# Altium PCB RatumnScanner_PcbDoc@20260329fix1.pcbdoc (part 2 of 2)
Units mil, origin at the board's own origin, x right, y up, seen from the top; angles counter-clockwise.
Board outline 3937.01 x 983.86 mil, 6 copper layers (Top Layer, 内层1, 内层2, CONNECTION, IO_PINS, Bottom Layer), stack 62.125 mil thick; 143 components, 128 nets, 581 pads, 301 vias.
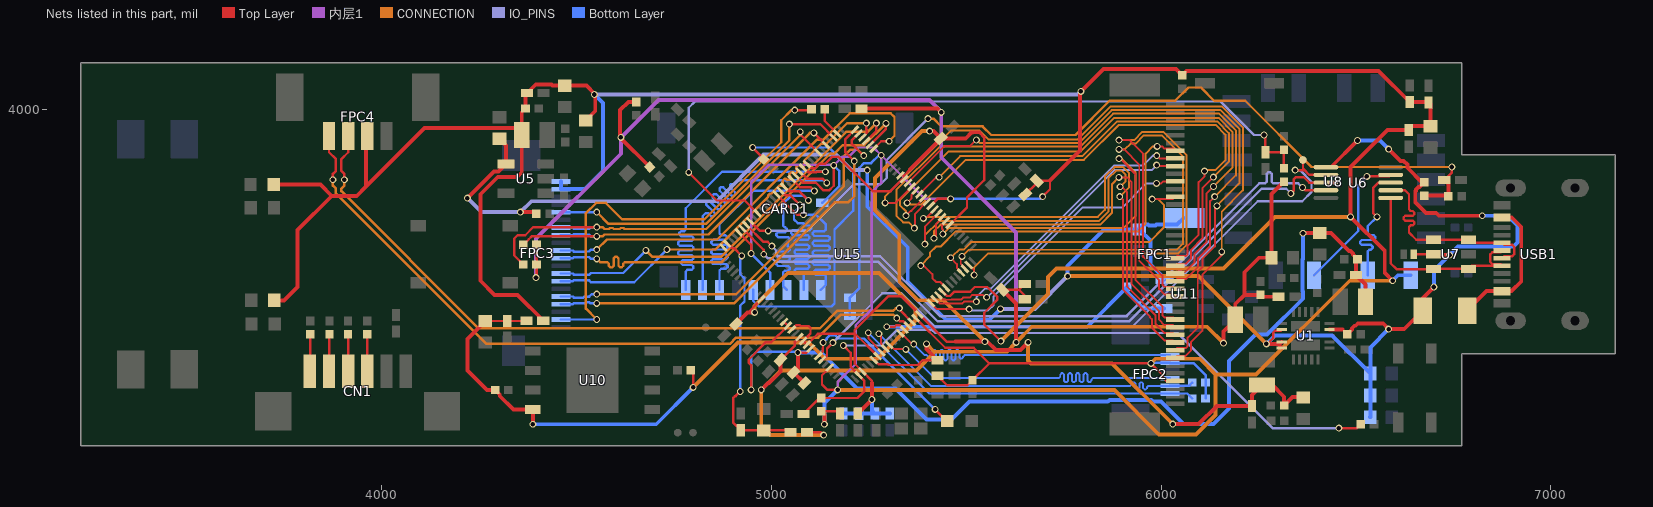
[diagram p6: the nets of this part, all layers, seen from the top]

## Via types
v1: diameter 17.72, hole 11.81, Top Layer to Bottom Layer, 301 vias

## Nets (pads, with @x,y where several pads share a name; then routed paths per layer and width w, separated by ;. In a path a pad name is that pad's centre, name@x,y a point inside that pad or via, vN(x,y) a via of type N, cw(c..) or ccw(c..) an arc to the next point about the centre after c; other vN are vias at no path point) (continued)
LCD_D5: FPC1.13 U15.93 | length 784.4
  Top Layer w5: v1(5459.96,3619) 5476.21,3602.76 5476.21,3593.79 5486.93,3583.06 U15.93@5486.93,3581.03 ; v1(5977.12,3769.61) 6008,3769.61 6008.66,3770.26 6030.48,3770.26 FPC1.13@6035.79,3775.57
  CONNECTION w5: v1(5459.96,3619) 5464.94,3623.99 5465.85,3623.99 5482.01,3640.14 5493.79,3640.14 5512.72,3659.08 5969.08,3659.08 6008,3698 6008,3754 5992.39,3769.61 v1(5977.12,3769.61)
LCD_D6: FPC1.26 U15.94 | length 1500.6
  Top Layer w5: v1(5489.2,3622.8) 5485.95,3619.55 5485.95,3603.53 5496.67,3592.81 U15.94@5496.67,3590.78 ; v1(5892,3897.04) 5904.96,3897.04 5944,3858 5944,3611.47 5994.67,3560.8 5994.67,3538.97 6008.66,3524.98 6030.48,3524.98 FPC1.26@6035.79,3519.67
  CONNECTION w5: v1(5489.2,3622.8) 5505.97,3639.58 6040.58,3639.58 6055.94,3654.94 6055.94,3879.31 6002.27,3932.98 5955.73,3932.98 5934.48,3911.73 5921.73,3911.73 5907.04,3897.04 v1(5892,3897.04)
LCD_D7: FPC1.25 U15.95 | length 1527
  Top Layer w5: U15.95@5506.42,3600.52 5520.16,3586.78 v1(5520.16,3574.82) ; v1(5892,3920.74) 5919.26,3920.74 5954,3886 5954,3621.17 6003.69,3571.48 6003.69,3549.65 6008.66,3544.68 6030.48,3544.68 FPC1.25@6035.79,3539.37
  CONNECTION w5: v1(5520.16,3574.82) 5520.16,3594.41 5556.31,3630.56 6044.31,3630.56 6064.95,3651.2 6064.95,3883.05 6006,3942 5952,3942 5930.74,3920.74 v1(5892,3920.74)
LCD_D8: FPC1.24 U15.109 | length 1640.6
  Top Layer w5: v1(5367,3695) 5368,3696 5368,3731.16 U15.109@5399.24,3762.4 ; FPC1.24@6035.79,3559.07 6041.1,3564.38 6062.93,3564.38 6094.95,3596.4 6094.95,3618.23 6126,3649.28 6126,3764.66 v1(6137.34,3776)
  CONNECTION w5: v1(5367,3695) 5352.25,3709.75 5338.25,3709.75 5320.98,3727.02 5320.98,3792.98 5432,3904 5792,3904 5877.02,3989.02 6149.23,3989.02 6192.06,3946.19 6192.06,3830.72 v1(6137.34,3776)
LCD_D9: FPC1.23 U15.110 | length 1502.5
  Top Layer w5: v1(5345.43,3727.09) 5357.94,3739.6 5358.98,3739.6 5389.5,3770.11 U15.110@5389.5,3772.14 ; FPC1.23@6035.79,3578.77 6041.05,3584.03 6062.93,3584.03 6085.93,3607.04 6085.93,3628.91 6116,3658.98 6116,3783.47 v1(6134.41,3801.89)
  CONNECTION w5: v1(5345.43,3727.09) 5345.43,3738.45 5330,3753.89 5330,3766.32 5455.68,3892 5794,3892 5880.03,3978.03 6147.47,3978.03 6183.05,3942.45 6183.05,3850.52 v1(6134.41,3801.89)
LCD_D10: FPC1.22 U15.111 | length 1294.7
  Top Layer w5: U15.111@5379.75,3781.89 5423.61,3825.74 v1(5430.26,3825.74) ; FPC1.22@6035.79,3598.42 6041.05,3603.68 6062.93,3603.68 6076.92,3617.67 6076.92,3639.55 6106,3668.63 6106,3798 v1(6134,3826)
  CONNECTION w5: v1(5430.26,3825.74) 5484.53,3880 5798,3880 5887.02,3969.02 6143.73,3969.02 6174.03,3938.72 6174.03,3866.03 v1(6134,3826)
LCD_D11: FPC1.21 U15.112 | length 1351.8
  Top Layer w5: v1(5348.31,3760.1) 5359.29,3771.08 5359.29,3778.87 5370.01,3789.6 U15.112@5370.01,3791.63 ; FPC1.21@6035.79,3618.07 6041.1,3623.38 6062.93,3623.38 6067.9,3628.35 6067.9,3650.18 6096,3678.28 6096,3813.08 6111.43,3828.51 v1(6111.43,3841.47)
  CONNECTION w5: v1(5348.31,3760.1) 5351.9,3760.1 5356,3756 5385.05,3756 5499.05,3870 5802,3870 5892,3960 6140,3960 6165.02,3934.98 6165.02,3869.77 6139.25,3844 6113.96,3844 v1(6111.43,3841.47)
LCD_D12: FPC1.34 U15.113 | length 1834.1
  Top Layer w5: v1(5292,3760) 5318.89,3760 U15.113@5360.27,3801.37 ; FPC1.34@6035.79,3362.17 6041.1,3367.48 6062.93,3367.48 6076.92,3381.47 6076.92,3403.3 6106,3432.38 6106,3576 6155.58,3625.58 v1(6155.58,3634)
  CONNECTION w5: v1(5292,3760) 5292,3776.75 5461.25,3946 5534,3946 5557.97,3922.03 5784.53,3922.03 5869.55,4007.05 6156.7,4007.05 6210.09,3953.66 6210.09,3792.09 6155.58,3737.58 v1(6155.58,3634)
LCD_D13: FPC1.33 U15.114 | length 1604.1
  Top Layer w5: U15.114@5350.52,3811.12 5445.41,3906 5510.66,3906 v1(5526,3921.34) ; FPC1.33@6035.79,3381.87 6041.1,3387.18 6062.93,3387.18 6067.9,3392.15 6067.9,3413.98 6094,3440.08 6094,3582.7 6106,3594.7 6106,3616.53 6138,3648.53 6138,3746.96 v1(6143.34,3752.3)
  CONNECTION w5: v1(5526,3921.34) 5534.33,3913.02 5788.27,3913.02 5873.28,3998.03 6152.97,3998.03 6201.08,3949.92 6201.08,3810.04 v1(6143.34,3752.3)
LCD_D14: FPC1.32 U15.107 | length 1193
  Top Layer w5: v1(5390,3720) 5395.82,3720 U15.107@5418.73,3742.91 ; v1(5894,3776) 5902,3768 5902,3538 5972,3468 5972,3465.37 5976.64,3460.73 5976.64,3438.9 6008.66,3406.88 6030.48,3406.88 FPC1.32@6035.79,3401.57
  CONNECTION w5: v1(5390,3720) 5394,3724 5838,3724 5855.97,3741.97 5855.97,3826.91 5880.72,3851.67 5902.56,3851.67 5918,3836.23 5918,3800 v1(5894,3776)
LCD_D15: FPC1.31 U15.106 | length 1244.9
  Top Layer w5: v1(5394,3654) 5394,3698.69 U15.106@5428.47,3733.17 ; v1(5894.72,3801.25) 5898.75,3801.25 5912,3788 5912,3546 5952,3506 5952,3505.07 5985.66,3471.41 5985.66,3449.59 6008.66,3426.58 6030.48,3426.58 FPC1.31@6035.79,3421.27
  CONNECTION w5: v1(5394,3654) 5394,3676.75 5430.42,3713.17 5840.42,3713.17 5864.98,3737.73 5864.98,3823.18 5884.46,3842.65 5898.83,3842.65 5908.98,3832.49 5908.98,3815.51 v1(5894.72,3801.25)
LCD_D16: FPC1.30 U15.105 | length 1124.8
  Top Layer w5: v1(5417.24,3669.24) 5422.66,3674.66 5422.66,3705.83 5438.22,3721.39 U15.105@5438.22,3723.42 ; v1(5891.64,3825.31) 5912.69,3825.31 5924,3814 5924,3552.77 5994.67,3482.1 5994.67,3460.27 6008.66,3446.28 6030.48,3446.28 FPC1.30@6035.79,3440.97
  CONNECTION w5: v1(5417.24,3669.24) 5417.24,3687.24 5434.16,3704.16 5844.16,3704.16 5874,3734 5874,3807.67 v1(5891.64,3825.31)
LCD_D17: FPC1.29 U15.104 | length 1208
  Top Layer w5: v1(5440,3680) 5440,3691.13 5437.24,3693.89 5437.24,3702.95 U15.104@5447.96,3713.68 ; v1(5892,3873.34) 5894.66,3873.34 5934,3834 5934,3562.47 6003.69,3492.78 6003.69,3470.85 6008.66,3465.88 6030.58,3465.88 FPC1.29@6035.79,3460.67
  CONNECTION w5: v1(5440,3680) 5455.14,3695.14 5903.14,3695.14 5934,3726 5934,3838.75 5899.41,3873.34 v1(5892,3873.34)
LCD_DCLK: FPC1.11 U15.85 | length 785
  Top Layer w5: U15.85@5408.99,3503.09 5424.76,3487.31 v1(5507.57,3487.31) ; v1(5988.17,3809.97) 5999.97,3809.97 6004.97,3814.97 FPC1.11@6035.79,3814.97
  IO_PINS w5: v1(5507.57,3487.31) 5510.88,3484 5556.46,3484 5570,3497.54 5570,3520 5798,3748 5900,3748 5961.97,3809.97 v1(5988.17,3809.97)
LCD_DEN: FPC1.7 U15.89 | length 989.2
  Top Layer w5: v1(5383.25,3598.75) 5391.27,3598.75 5412.89,3577.14 5412.89,3567.05 5423.05,3556.89 5433.14,3556.89 U15.89@5447.96,3542.06 ; v1(5990,3904.77) 6002.87,3904.77 6008.66,3898.98 6030.48,3898.98 FPC1.7@6035.79,3893.67
  CONNECTION w5: v1(5383.25,3598.75) 5406.9,3622.41 5406.9,3631.65 5423.25,3648 5434,3648 5472.13,3686.13 5940.13,3686.13 5960.24,3706.24 5960.24,3761.96 5959.78,3762.42 5959.78,3776.79 5960.24,3777.26 5960.24,3886.24 5978.77,3904.77 v1(5990,3904.77)
LCD_HSYNC: FPC1.9 U15.87 | length 761.2
  Top Layer w5: U15.87@5428.47,3522.58 5430.51,3522.58 5441.23,3511.85 5446.27,3511.85 5446.74,3511.38 5462.24,3511.38 5462.86,3512 5487.25,3512 5492.27,3517.02 5508.61,3517.02 5515.6,3524 5542,3524 5548.13,3517.87 v1(5552.39,3517.87) ; v1(5988.39,3856.93) 5990.94,3854.37 FPC1.9@6035.79,3854.37
  IO_PINS w5: v1(5552.39,3517.87) 5553.87,3517.87 5880,3844 5975.46,3844 v1(5988.39,3856.93)
LCD_VSYNC: FPC1.8 U15.86 | length 788.1
  Top Layer w5: U15.86@5418.73,3512.83 5420.76,3512.83 5431.49,3502.11 5443.89,3502.11 5444,3502 5490,3502 5494.66,3506.66 v1(5526,3506.66) ; v1(5988.77,3881.07) 5995.87,3873.97 FPC1.8@6035.79,3873.97
  IO_PINS w5: v1(5526,3506.66) 5526,3518 5548,3540 5563.25,3540 5876.27,3853.02 5876.94,3853.02 5879.93,3856 5954,3856 5979.07,3881.07 v1(5988.77,3881.07)
MIPI/LVDS_CLK_N: FPC3.8 U15.125 | length 1042.7
  Top Layer w6.18: U15.125@5243.35,3918.29 5269.32,3944.27 v1(5269.32,3964.68)
  CONNECTION w6.18: v1(4678,3638) 4694,3622 4872.04,3622 5192.04,3942 5246.64,3942 v1(5269.32,3964.68)
  Bottom Layer w6.18: FPC3.8@4459.79,3578.66 4490.58,3578.66 4493.34,3575.91 4525.35,3575.91 4526.02,3575.24 4532.2,3575.24 4536.96,3580 4620,3580 v1(4678,3638)
MIPI/LVDS_CLK_P: FPC3.7 U15.126 | length 1041.4
  Top Layer w6.18: U15.126@5233.6,3928.04 5244.92,3939.35 5244.92,3948.07 5243.64,3949.35 v1(5243.64,3964.36)
  CONNECTION w6.18: v1(4732,3640.31) 4856.31,3640.31 4991.29,3775.29 4991.29,3779.18 4996.15,3784.03 5000.03,3784.03 5020.15,3804.15 5026.06,3804.15 5028.89,3806.98 5028.89,3816.78 5033.74,3821.63 5037.63,3821.63 5040.26,3819 5046.44,3819 5049,3821.56 5049,3827.74 5046.37,3830.37 5046.37,3834.26 5051.22,3839.11 5055.11,3839.11 5057.74,3836.48 5063.92,3836.48 5066.48,3839.04 5066.48,3845.22 5063.85,3847.85 5063.85,3851.74 5068.71,3856.6 5072.6,3856.6 5075.22,3853.97 5081.41,3853.97 5083.97,3856.53 5083.97,3867.97 5128,3912 5142,3912 5194.36,3964.36 v1(5243.64,3964.36)
  Bottom Layer w6.18: FPC3.7@4459.79,3558.97 4490.58,3558.97 4493.34,3561.73 4519.48,3561.73 4520.14,3561.06 4532.2,3561.06 4536.96,3556.3 4647.99,3556.3 v1(4732,3640.31)
MIPI/LVDS_D0_N: FPC3.5 U15.127 | length 1064
  Top Layer w6.18: U15.127@5223.86,3937.78 5206,3919.92 5206,3912 v1(5237,3881)
  CONNECTION w6.18: v1(4552,3525.64) 4909.13,3525.64 5186,3802.51 5186,3880 5202,3896 5222,3896 v1(5237,3881)
  Bottom Layer w6.18: FPC3.5@4459.79,3519.6 4490.58,3519.6 4493.33,3516.85 4517.76,3516.85 4520.14,3519.24 4532.2,3519.24 4538.6,3525.64 v1(4552,3525.64)
MIPI/LVDS_D0_P: FPC3.4 U15.128 | length 1060.3
  Top Layer w6.18: v1(5212.59,3867.21) 5190,3889.8 5190,3923.41 U15.128@5214.11,3947.53
  CONNECTION w6.18: v1(4552,3501.94) 4903.94,3501.94 5163.01,3761.01 5197.01,3761.01 5212.59,3776.59 v1(5212.59,3867.21)
  Bottom Layer w6.18: FPC3.4@4459.79,3499.92 4490.58,3499.92 4493.33,3502.68 4523.63,3502.68 4526.02,3505.06 4532.2,3505.06 4535.32,3501.94 v1(4552,3501.94)
MIPI/LVDS_D1_N: FPC3.11 U15.123 | length 1123.5
  Top Layer w6.18: U15.123@5262.83,3898.81 5282.03,3918 v1(5302,3918)
  CONNECTION w6.18: v1(4552,3640) 4578,3666 4861.13,3666 5117.33,3922.2 5133.56,3922.2 5201.36,3990 5306,3990 5316,3980 5316,3932 v1(5302,3918)
  Bottom Layer w6.18: FPC3.11@4459.79,3637.71 4490.58,3637.71 4493.33,3634.96 4519.87,3634.96 4520.14,3635.24 4532.2,3635.24 4536.96,3640 v1(4552,3640)
MIPI/LVDS_D1_P: FPC3.10 U15.124 | length 1123.5
  Top Layer w6.18: U15.124@5253.09,3908.55 5294,3949.46 v1(5294,3964)
  CONNECTION w6.18: v1(4552,3616.3) 4560.3,3608 4578.6,3608 4582.98,3603.63 4582.98,3598.37 4587.35,3594 4590.97,3594 4595.34,3598.37 4595.34,3617.63 4599.71,3622 4603.33,3622 4607.7,3617.63 4607.7,3598.76 4612.07,3594.39 4615.69,3594.39 4620.06,3598.76 4620.06,3603.63 4624.43,3608 4872.46,3608 5150.91,3886.45 5161.71,3886.45 5183.26,3908 5238,3908 v1(5294,3964)
  Bottom Layer w6.18: FPC3.10@4459.79,3618.03 4490.58,3618.03 4493.33,3620.79 4525.74,3620.79 4526.02,3621.06 4532.2,3621.06 4536.96,3616.3 v1(4552,3616.3)
MIPI/LVDS_MCLK0: FPC3.2 R9.2 | length 1134.1
  Top Layer w6.18: v1(5060,3998) 5100.96,3998 R9.2@5102.96,4000
  CONNECTION w6.18: v1(4552,3460.55) 4524,3488.55 4524,3733.51 4550.49,3760 4575,3760 4617,3718 4828,3718 5025.32,3915.32 5025.32,3972.06 5051.26,3998 v1(5060,3998)
  Bottom Layer w6.18: FPC3.2@4459.79,3460.55 v1(4552,3460.55)
MIPI/LVDS_RST: FPC3.16 U15.3 | length 856.7
  Top Layer w6.18: v1(5046,3962) 5125.45,3962 U15.3@5159.41,3928.04
  CONNECTION w6.18: v1(4552,3736.14) 4582.14,3706 4831.81,3706 5046,3920.19 v1(5046,3962)
  Bottom Layer w6.18: FPC3.16@4459.79,3736.14 v1(4552,3736.14)
MIPI_CLK: R9.1 U15.2 | length 75.5
  Top Layer w6.18: R9.1@5137.04,4000 5137.04,3969.9 U15.2@5169.16,3937.78
MIPI_I2C_SCL: FPC3.13 R48.1 U15.5 | length 1004.3
  Top Layer w6.18: v1(5109.12,3939.35) U15.5@5139.92,3908.55
  Top Layer w6.2: R48.1@4363.48,3652.17 4377.34,3666.03 4377.34,3666.56 4382.66,3671.88 4383.19,3671.88 4385.31,3674 v1(4552,3674)
  CONNECTION w6.18: v1(4552,3674) 4567.04,3674 4571.9,3678.86 4838.42,3678.86 5098.91,3939.35 v1(5109.12,3939.35)
  Bottom Layer w6.18: FPC3.13@4459.79,3677.08 4490.58,3677.08 4493.44,3679.94 4519.05,3679.94 4520.13,3678.86 4532.1,3678.86 4536.96,3674 v1(4552,3674)
MIPI_I2C_SDA: FPC3.14 R47.1 U15.7 | length 1104.4
  Top Layer w6.18: v1(5074,3942) 5074,3935.51 U15.7@5120.44,3889.07
  Top Layer w6.2: R47.1@4363.48,3601.97 4340,3625.45 4340,3668 4348.86,3676.86 4368.29,3676.86 4389.14,3697.7 v1(4552,3697.7)
  CONNECTION w6.18: v1(4552,3697.7) 4567.04,3697.7 4571.9,3692.84 4583.35,3692.84 4585.93,3695.42 4593.12,3695.42 4595.71,3692.84 4610.77,3692.84 4613.35,3695.42 4620.54,3695.42 4623.13,3692.84 4833.07,3692.84 5074,3933.77 v1(5074,3942)
  Bottom Layer w6.18: FPC3.14@4459.79,3696.77 4490.58,3696.77 4493.44,3693.92 4524.84,3693.92 4525.92,3692.84 4532.1,3692.84 4536.96,3697.7 v1(4552,3697.7)
NPOR: C6.2 R4.1 R23.1 U15.66 | length 1772.1
  Top Layer w6.2: C6.2@5082.41,3218.4 5123.35,3259.35 R4.1@5127.91,3259.35 5221.35,3259.35 5238,3276 5238,3303.82 U15.66@5223.86,3317.96 5223.86,3319.14 5203.78,3339.22 5203.78,3374.91 v1(5184.75,3393.94) ; v1(6456,3182) 6502.45,3182 R23.1@6512.33,3191.88
  IO_PINS w6.2: v1(5184.75,3393.94) 5281.94,3393.94 5322,3434 5412.45,3434 5420.45,3426 6042,3426 6286,3182 v1(6456,3182)
PWM_LCD: R46.2 U11.4 U15.78 | length 837.4
  Top Layer w6.2: v1(5296,3442) 5316.54,3442 5320.74,3446.2 5329.45,3446.2 U15.78@5340.78,3434.88
  Bottom Layer w10: v1(5296,3442) 5811.04,3442 R46.2@5914,3544.96 5914,3530 5955.29,3488.71 U11.4@6007.49,3488.71
RD+: CN1.2 R43.2 | length 95.7
  Top Layer w6.2: CN1.2@3864.76,3327.67 3866,3328.91 R43.2@3866,3422.83
RD-: CN1.1 R42.2 | length 95.6
  Top Layer w6.2: CN1.1@3815.55,3327.67 3816.49,3328.61 R42.2@3816.49,3422.83
RECOVERY: C8.2 R24.1 R25.1 U15.23 | length 2048.6
  Top Layer w6.18: C8.2@6267.74,3889.66 6308.15,3889.66 R24.1@6315.11,3896.63 R25.1@6315.11,3848.38
  Top Layer w6.2: v1(4788,3838) 4860,3766 4931.71,3766 U15.23@4964.54,3733.17 ; v1(6264,3934) 6267.74,3930.26 C8.2@6267.74,3889.66
  IO_PINS w6.2: v1(4788,3838) 4788,4004 4804,4020 6152,4020 6238,3934 v1(6264,3934)
SDMMC0_CLK: CARD1.5 R10.2 | length 929
  Top Layer w6.18: v1(4952,3902) 4979.95,3874.05 R10.2@4979.95,3872.05
  Bottom Layer w6.18: v1(4952,3902) 5148,3902 5210,3840 5210,3740 5162,3692 5162,3502 5154,3494 4968,3494 4953.53,3508.47 CARD1.5@4953.53,3536.57
SDMMC0_CMD: CARD1.3 U15.16 | length 570.6
  Top Layer w6.18: U15.16@5032.75,3801.37 5033.95,3801.37 5045.26,3790.06 5071.3,3790.06 v1(5094.98,3766.38)
  Bottom Layer w6.18: CARD1.3@5040.14,3536.57 5030,3546.71 5030,3581.3 5034.37,3585.67 5042.85,3585.67 5047.22,3590.04 5047.22,3593.66 5042.85,3598.03 5017.15,3598.03 5012.78,3602.4 5012.78,3606.02 5017.15,3610.4 5042.85,3610.4 5047.22,3614.77 5047.22,3618.39 5042.85,3622.76 5017.15,3622.76 5012.78,3627.13 5012.78,3630.75 5017.15,3635.12 5042.85,3635.12 5047.22,3639.49 5047.22,3643.11 5041.87,3648.46 5041.87,3658.87 5047.22,3664.22 5047.22,3667.84 5042.85,3672.21 5017.15,3672.21 5012.78,3676.58 5012.78,3680.2 5017.15,3684.57 5035.63,3684.57 5040,3688.94 5040,3692.56 5035.63,3696.93 5034.37,3696.93 5030,3701.3 5030,3758 5050,3778 5083.36,3778 v1(5094.98,3766.38)
SDMMC0_D0: CARD1.7 U15.14 | length 764.4
  Top Layer w6.18: U15.14@5052.24,3820.86 5072.84,3800.25 5100.38,3800.25 v1(5110.29,3790.35)
  Bottom Layer w6.18: CARD1.7@4866.91,3536.57 4866.91,3586.44 4871.28,3590.81 4883.22,3590.81 4887.59,3595.18 4887.59,3598.8 4883.22,3603.17 4850.6,3603.17 4846.23,3607.54 4846.23,3611.16 4850.6,3615.53 4883.22,3615.53 4887.59,3619.9 4887.59,3623.53 4883.22,3627.9 4850.6,3627.9 4846.23,3632.27 4846.23,3635.89 4850.6,3640.26 4883.22,3640.26 4887.59,3644.63 4887.59,3648.25 4883.22,3652.62 4850.6,3652.62 4846.23,3656.99 4846.23,3660.61 4850.6,3664.98 4881.81,3664.98 4886.18,3669.35 4886.18,3672.97 4881.81,3677.35 4871.28,3677.35 4866.91,3681.72 4866.91,3704.91 4952.57,3790.57 5085.07,3790.57 5085.97,3791.47 5109.17,3791.47 v1(5110.29,3790.35)
SDMMC0_D1: CARD1.8 U15.12 | length 874.4
  Top Layer w6.18: U15.12@5071.72,3840.35 5072.92,3840.35 5091.07,3822.2 5131.28,3822.2 v1(5142.07,3811.41)
  Bottom Layer w6.2: CARD1.8@4823.6,3536.57 4823.6,3725.61 4831.36,3733.36 4837.56,3733.36 4845.26,3725.65 4851.46,3725.65 4854.03,3728.22 4854.03,3734.42 4832.42,3756.03 4832.42,3762.23 4834.99,3764.8 4841.19,3764.8 4862.8,3743.19 4869,3743.19 4871.57,3745.75 4871.57,3751.95 4849.95,3773.57 4849.95,3779.77 4852.52,3782.34 4858.72,3782.34 4880.34,3760.72 4886.54,3760.72 4889.1,3763.29 4889.1,3769.49 4867.49,3791.1 4867.49,3797.3 4870.06,3799.87 4876.26,3799.87 4897.87,3778.26 4904.07,3778.26 4906.64,3780.83 4906.64,3787.03 4894.27,3799.4 4894.27,3805.6 4896.84,3808.17 4906.17,3808.17 4916,3818 5135.48,3818 v1(5142.07,3811.41)
SDMMC0_D2: CARD1.1 U15.18 | length 694.6
  Top Layer w6.18: U15.18@5013.26,3781.89 5065.65,3729.49 v1(5082.27,3729.49)
  Bottom Layer w6.2: v1(5082.27,3729.49) 5114.51,3729.49 5140,3704 5140,3691.8 5135.62,3687.42 5110.38,3687.42 5106,3683.03 5106,3679.4 5110.38,3675.02 5145.59,3675.02 5149.98,3670.63 5149.98,3667 5145.59,3662.62 5110.38,3662.62 5106,3658.23 5106,3654.6 5110.38,3650.22 5145.59,3650.22 5149.98,3645.83 5149.98,3642.2 5145.59,3637.82 5110.38,3637.82 5106,3633.43 5106,3629.8 5110.38,3625.42 5145.59,3625.42 5149.98,3621.03 5149.98,3617.4 5145.59,3613.02 5110.38,3613.02 5106,3608.63 5106,3605 5110.38,3600.62 5145.59,3600.62 5149.98,3596.23 5149.98,3592.6 5145.59,3588.22 5113.27,3588.22 5108.89,3583.83 5108.89,3580.2 5113.27,3575.82 5135.62,3575.82 5140,3571.43 5140,3549.81 CARD1.1@5126.75,3536.57
SDMMC0_D3: CARD1.2 U15.17 | length 658.2
  Top Layer w6.18: U15.17@5023,3791.63 5024.2,3791.63 5035.97,3779.86 5047.98,3779.86 v1(5073.29,3754.56)
  Bottom Layer w6.18: v1(5073.29,3754.56) 5073.29,3750.93 5058,3735.65 5058,3717.63 5067.52,3708.12 5081.64,3708.12 5087.82,3701.93 5098.11,3701.93 5102.48,3697.56 5102.48,3693.94 5098.11,3689.57 5055.36,3689.57 5050.99,3685.2 5050.99,3681.58 5055.36,3677.21 5092.7,3677.21 5097.07,3672.84 5097.07,3669.22 5092.7,3664.85 5063.6,3664.85 5059.23,3660.48 5059.23,3656.86 5063.6,3652.49 5092.7,3652.49 5097.07,3648.11 5097.07,3644.49 5092.7,3640.12 5063.6,3640.12 5059.23,3635.75 5059.23,3632.13 5063.6,3627.76 5092.7,3627.76 5097.07,3623.39 5097.07,3619.77 5092.7,3615.4 5063.6,3615.4 5059.23,3611.03 5059.23,3607.41 5063.6,3603.04 5092.7,3603.04 5097.07,3598.67 5097.07,3595.05 5092.7,3590.67 5063.6,3590.67 5059.23,3586.3 5059.23,3582.68 5063.6,3578.31 5079.08,3578.31 5083.45,3573.94 CARD1.2@5083.45,3536.57
SDMMC0_DET: CARD1.9 U15.11 | length 915.2
  Top Layer w6.18: U15.11@5081.47,3850.09 5091.82,3839.74 5093.02,3839.74 5093.98,3838.78 5099.02,3838.78 5099.49,3838.31 5115.47,3838.31 5116.91,3839.74 v1(5138.68,3839.74)
  Bottom Layer w6.18: CARD1.9@4780.3,3536.57 4780.3,3583.87 4784.67,3588.24 4795.52,3588.24 4799.89,3592.61 4799.89,3596.23 4795.52,3600.61 4772.78,3600.61 4768.41,3604.98 4768.41,3608.6 4772.78,3612.97 4795.52,3612.97 4799.89,3617.34 4799.89,3620.96 4795.52,3625.33 4765.07,3625.33 4760.7,3629.7 4760.7,3633.32 4765.07,3637.69 4795.52,3637.69 4799.89,3642.06 4799.89,3645.68 4795.52,3650.05 4765.07,3650.05 4760.7,3654.43 4760.7,3658.05 4765.07,3662.42 4795.52,3662.42 4799.89,3666.79 4799.89,3670.41 4795.52,3674.78 4768.24,3674.78 4763.87,3679.15 4763.87,3682.77 4768.24,3687.14 4775.93,3687.14 4780.3,3691.51 4780.3,3746.3 4873.74,3839.74 v1(5138.68,3839.74)
SOC_USB_DN: U6.4 U15.26 | length 1787.3
  Top Layer w6.18: U15.26@4935.31,3703.93 4935.46,3703.93 4979.69,3659.69 4990.69,3659.69 v1(5001.33,3649.06) ; v1(6362.75,3799.25) 6369.69,3792.31 U6.4@6422.93,3792.31
  IO_PINS w6.18: v1(5001.33,3649.06) 5011.96,3638.43 5011.96,3627.43 5016.33,3623.06 5278.94,3623.06 5432.62,3469.38 5911.38,3469.38 6252,3810 6266.79,3810 6271.16,3814.37 6271.16,3834.58 6275.53,3838.95 6279.16,3838.95 6283.53,3834.58 6283.53,3814.37 6287.9,3810 6352,3810 v1(6362.75,3799.25)
SOC_USB_DP: U6.3 U15.27 | length 1788.8
  Top Layer w6.18: U15.27@4925.57,3694.2 4925.57,3694.05 4980.45,3639.18 v1(4980.45,3628.18) ; v1(6333.06,3784) 6340,3790.94 6340,3820 6346,3826 6366,3826 6380,3812 U6.3@6422.93,3812
  IO_PINS w6.18: v1(4980.45,3628.18) 4991.08,3617.55 5002.08,3617.55 5010.54,3609.08 5273.6,3609.08 5426.96,3455.72 5917.49,3455.72 6257.79,3796.02 6321.03,3796.02 v1(6333.06,3784)
TD+: CN1.4 R56.2 | length 95.1
  Top Layer w6.2: CN1.4@3963.19,3327.67 R56.2@3963.23,3422.83
TD-: CN1.3 R55.2 | length 95.4
  Top Layer w6.2: R55.2@3913.49,3422.83 3913.97,3422.35 CN1.3@3913.97,3327.67
TP_INT: FPC2.3 U15.74 | length 903.2
  Top Layer w5: U15.74@5301.8,3395.9 5303.84,3395.9 5314.56,3385.18 5343.98,3385.18 v1(5345.21,3383.94)
  Bottom Layer w5: v1(5345.21,3383.94) 5419,3310.16 5737.63,3310.16 5741.17,3313.7 5741.17,3319.42 5744.71,3322.95 5747.63,3322.95 5751.17,3319.42 5751.17,3303.4 5754.71,3299.87 5757.63,3299.87 5761.17,3303.4 5761.17,3319.42 5764.71,3322.95 5767.63,3322.95 5771.17,3319.42 5771.17,3303.4 5774.71,3299.87 5777.63,3299.87 5781.17,3303.4 5781.17,3319.42 5784.71,3322.95 5787.63,3322.95 5791.17,3319.42 5791.17,3303.4 5794.71,3299.87 5797.63,3299.87 5801.17,3303.4 5801.17,3319.42 5804.71,3322.95 5807.63,3322.95 5811.17,3319.42 5811.17,3303.7 5814.71,3300.16 5817.63,3300.16 5821.17,3303.7 5821.17,3306.62 5824.71,3310.16 FPC2.3@6022.69,3310.16
TP_RST: FPC2.6 U15.77 | length 902.4
  Top Layer w5: U15.77@5331.03,3425.14 5333.07,3425.14 5360.87,3397.34 v1(5365.34,3397.34)
  Bottom Layer w5: v1(5365.34,3397.34) 5393.46,3369.21 5398.62,3369.21 5402.15,3365.67 5402.15,3359.54 5405.69,3356 5408.62,3356 5412.15,3359.54 5412.15,3378.88 5415.69,3382.42 5418.62,3382.42 5422.15,3378.88 5422.15,3359.54 5425.69,3356 5428.62,3356 5432.15,3359.54 5432.15,3378.88 5435.69,3382.42 5438.62,3382.42 5442.15,3378.88 5442.15,3359.54 5445.69,3356 5448.62,3356 5452.15,3359.54 5452.15,3378.88 5455.69,3382.42 5458.62,3382.42 5462.15,3378.88 5462.15,3359.54 5465.69,3356 5468.62,3356 5472.15,3359.54 5472.15,3378.88 5475.69,3382.42 5478.62,3382.42 5482.15,3378.88 5482.15,3363.91 5485.69,3360.38 5488.62,3360.38 5492.15,3363.91 5492.15,3365.67 5495.69,3369.21 FPC2.6@6022.69,3369.21
TP_SCL: FPC2.1 R40.2 U15.72 | length 965.4
  Top Layer w5: v1(5248.69,3426.69) 5248.69,3412.08 5282.31,3378.45 U15.72@5282.31,3376.42
  Bottom Layer w5: v1(5248.69,3426.69) 5404.58,3270.79 FPC2.1@6022.69,3270.79
  Bottom Layer w6.2: FPC2.1@6022.69,3270.79 6067.08,3270.79 R40.2@6079.97,3257.9
TP_SDA: FPC2.2 R41.2 U15.73 | length 960.4
  Top Layer w5: v1(5275.86,3424.04) 5281.33,3418.57 5281.33,3398.92 5292.06,3388.19 U15.73@5292.06,3386.16
  Bottom Layer w5: v1(5275.86,3424.04) 5409.43,3290.47 5920.52,3290.47 5924.06,3294.01 5924.06,3296.14 5927.59,3299.68 5930.52,3299.68 5934.06,3296.14 5934.06,3284.81 5937.59,3281.27 5940.52,3281.27 5944.06,3284.81 5944.06,3296.14 5947.59,3299.68 5950.52,3299.68 5954.06,3296.14 5954.06,3284.81 5957.59,3281.27 5960.52,3281.27 5964.06,3284.81 5964.06,3286.93 5967.59,3290.47 FPC2.2@6022.69,3290.47
  Bottom Layer w6.2: FPC2.2@6022.69,3290.47 6071.6,3290.47 R41.2@6079.97,3298.84
TYPEC_DN: U6.6 U7.1 U7.6 USB1.5 USB1.7 | length 552.5
  Top Layer w6.18: U6.6@6589.07,3772.63 6589.07,3604.93 6604,3590 6698.04,3590 U7.6@6698.71,3590.67 U7.1@6788.87,3590.67 6796.55,3598.35 USB1.5@6875.16,3598.35 6870.46,3603.05 6849.75,3603.05 6844.44,3608.36 6844.44,3627.69 6849.75,3633.01 6870.45,3633.01 USB1.7@6875.16,3637.72
TYPEC_DP: U6.7 U7.3 U7.4 USB1.6 USB1.8 | length 552
  Top Layer w6.18: U6.7@6589.07,3792.31 6625.69,3792.31 6636,3782 6636,3743.5 6640.37,3739.13 6645.63,3739.13 6650,3734.76 6650,3731.14 6645.63,3726.77 6626.37,3726.77 6622,3722.4 6622,3718.78 6626.37,3714.41 6645.63,3714.41 6650,3710.04 6650,3706.42 6645.63,3702.05 6640.37,3702.05 6636,3697.68 6636,3684 6654.53,3665.47 U7.4@6698.71,3665.47 U7.3@6788.87,3665.47 6796.94,3657.4 USB1.8@6875.16,3657.4 6879.86,3652.7 6900.58,3652.7 6905.89,3647.38 6905.89,3628.05 6900.58,3622.74 6879.87,3622.74 USB1.6@6875.16,3618.03
UART2_RX: FPC4.3 U15.80 | length 1802.9
  Top Layer w6.2: v1(3904.34,3819.18) 3904.34,3834.23 3896.58,3842 3896.58,3872.37 3914.18,3889.97 FPC4.3@3914.18,3931.61 ; v1(5328.57,3489.66) 5328.57,3486.06 U15.80@5360.27,3454.37
  CONNECTION w6.2: v1(3904.34,3819.18) 3904.34,3804.12 3896.58,3796.35 3896.58,3790.15 4248.73,3438 5124,3438 5169.46,3483.46 5313.36,3483.46 5319.56,3489.66 v1(5328.57,3489.66)
UART2_TX: FPC4.4 U15.79 | length 1832
  Top Layer w6.2: FPC4.4@3864.97,3931.61 3864.97,3889.97 3882.58,3872.37 3882.58,3842 3874.81,3834.23 v1(3874.81,3819.18) ; v1(5321.75,3464.15) 5329.48,3456.42 5337.54,3456.42 5349.34,3444.62 U15.79@5350.52,3444.62
  CONNECTION w6.2: v1(3874.81,3819.18) 3874.81,3804.12 3882.58,3796.35 3882.58,3784.35 4268.93,3398 4893.49,3398 4909.61,3414.12 5119.91,3414.12 5179.03,3473.24 5312.66,3473.24 v1(5321.75,3464.15)
USB_CTRL: TP1.1 U6.2 U15.59 | length 1708.2
  Top Layer w6.18: U15.59@5130.18,3356.94 5131.38,3356.94 5142.69,3368.25 5142.69,3386.15 v1(5157.74,3401.2) ; v1(6344,3844) 6368,3844 ; TP1.1@6364,3870 6364,3848 6368,3844 ; U6.2@6422.93,3831.68 6380.32,3831.68 6368,3844
  IO_PINS w6.18: v1(5157.74,3401.2) 5284.54,3528 5334,3528 5420,3442 5926,3442 6248,3764 6362,3764 6386,3788 6386,3814 6356,3844 v1(6344,3844)
USB_DET_IN: C58.2 R27.1 R28.2 U15.25 | length 2260.5
  Top Layer w6.2: U15.25@4945.05,3713.68 4970.73,3688 v1(4992,3688) ; C58.2@6726.65,3818.82 6746,3838.17 v1(6746,3852)
  Top Layer w10: R27.1@6675.24,3778.42 6735.32,3778.42 R28.2@6737.09,3776.65 6737.09,3808.38 C58.2@6726.65,3818.82
  CONNECTION w6.2: v1(5402,3976) 5416,3976 5436,3956 5542,3956 5564,3934 5780,3934 5868,4022 6036,4022 6070,4056 6102,4056 6136,4022 6216,4022 6386,3852 v1(6746,3852)
  IO_PINS w6.2: v1(4992,3688) 5092,3688 5212,3808 5280,3808 5296,3824 5296,3870 v1(5402,3976)
VBUS: F1.1 USB1.2 USB1.11 | length 368.5
  Top Layer w10: F1.1@6785.28,3483.5 6835.17,3533.39 USB1.2@6875.16,3533.39 6899.39,3533.39 6924,3558 6924,3698 6899.63,3722.37 USB1.11@6875.16,3722.37
VCC1V8_CODEC: C16.2 C17.2 L2.2 U15.31 | length 654.7
  Top Layer w6.2: U15.31@4886.6,3655.22 4887.78,3655.22 4899.11,3643.9 4904.1,3643.9 v1(4924,3624) ; v1(4920.1,3275.9) 4908.2,3264 4906.38,3264 4902,3259.62 4902,3238.79 4901.9,3238.7 4901.9,3196.17 C17.2@4921.62,3176.46 5043.73,3176.46 L2.2@5048.8,3171.39
  Bottom Layer w6.2: v1(4920.1,3275.9) 4920.1,3496.2 4931.11,3507.21 4931.11,3565.92 4920.1,3576.94 4920.1,3620.1 v1(4924,3624)
VCC1V8_MICBIAS: U15.32
VCC_1V8: C14.2 C15.2 C37.1 C38.1 C42.2 C43.1 L1.2 L2.1 L4.2 L6.1 R6.2 R11.2 R15.2 R25.2 R47.2 R48.2 U15.53 U15.70 | length 5358.2
  Top Layer w6.2: v1(4396,3568) 4397.56,3569.56 R47.2@4397.56,3601.97 R48.2@4397.56,3652.17 ; C14.2@5023.17,3357.17 5060.4,3394.4 5060.4,3402.88 5071.72,3414.21 U15.53@5071.72,3415.39 ; L2.1@5091.72,3171.39 5126.61,3171.39 v1(5134,3164) ; U15.70@5262.83,3356.94 5264,3356.94 5275.34,3345.6 5298.4,3345.6 5300,3344 5376,3344 5388.01,3356.01 C15.2@5426.75,3356.01 ; L4.2@5593.17,3536.83 5635.1,3536.83 ; C38.1@5650.04,3512.82 5650.04,3521.88 5635.1,3536.83 ; C37.1@5650.04,3551.77 5635.1,3536.83
  Top Layer w10: R11.2@4653.27,4018.89 4632.89,4018.89 4612,3998 4612,3928 R6.2@4687.95,3852.05 ; v1(4974,3280) 4991.33,3297.33 4993.89,3297.33 5023.17,3326.61 C14.2@5023.17,3357.17 ; L1.2@5231.31,4001.71 5426.29,4001.71 v1(5436,3992) ; v1(5398,3398) 5398,3384.75 C15.2@5426.75,3356.01 ; L4.2@5593.17,3536.83 5628,3502 v1(5628,3401.84) ; v1(6160,3400) 6160,3429.56 L6.1@6190.28,3459.84 6190.28,3500.28 6214.02,3524.02 ; C42.2@6301.47,3519.06 6259.89,3519.06 R15.2@6254.93,3524.02 6214.02,3524.02 ; R25.2@6315.11,3814.3 6283.37,3782.56 C43.1@6283.37,3619.06 6251.06,3619.06 6214.02,3582.02 6214.02,3524.02
  内层1 w10: v1(4396,3568) 4396,3668 4614,3886 v1(4614,3928) 4710,4024 5406,4024 v1@5436,3994 ; v1(5436,3992) 5436,3876 5628,3684 v1(5628,3401.84)
  CONNECTION w10: v1(5134,3164) 4998,3164 4974,3188 v1(4974,3280) 5024,3330 5372,3330 5420,3378 ; v1(5398,3398) 5418,3378 5420,3378 ; v1(6160,3400) 6118,3442 5668.16,3442 v1(5628,3401.84) 5604.16,3378 5420,3378
VCC_3V3: C10.1 C13.1 C29.2 C33.2 C34.2 C35.2 C50.1 C52.2 C53.2 C56.2 C57.2 C75.2 C76.2 CARD1.4 FPC1.37 FPC2.5 FPC3.19 FPC3.20 FPC4.2 L3.1 L8.1 L9.1 R4.2 R20.2 R26.2 R32.2 R34.2 R39.2 R40.1 R41.1 U8.11 U15.13 U15.28 U15.61 U15.81 U15.88 U15.108 | length 13210.8
  Top Layer w6.18: U15.13@5061.98,3830.61 5080.59,3812 5114,3812 5134,3792 5148,3792 5160,3804 v1(5160,3856)
  Top Layer w6.2: U15.28@4915.83,3684.45 4948,3652.28 v1(4948,3630) ; R4.2@5127.91,3225.27 5170.19,3225.27 C35.2@5176,3219.46 ; U15.61@5149.67,3337.45 5130,3317.78 5130,3294 5144,3280 v1(5170,3280) ; U15.81@5370.01,3464.11 5446.12,3388 5518.96,3388 5558.96,3348 ; U15.108@5408.99,3752.65 5426.33,3770 v1(5460,3770) ; C34.2@5426.54,3316 5450.54,3292 5502.96,3292 R26.2@5516,3305.04 5558.96,3348 ; U15.88@5438.22,3532.32 5439.4,3532.32 5450.73,3520.99 5458.25,3520.99 5469.58,3532.32 5510.32,3532.32 5522,3544 5554,3544 5580,3518 5580,3511.8 5546.1,3477.9 5546.1,3447.9 v1(5589,3405) ; L3.1@5651.17,3781.17 5681.17,3811.17 C29.2@5681.17,3816.83 5714.83,3816.83 5714.83,3794.83 v1(5696,3776) ; FPC1.37@6035.79,3303.17 6013.12,3303.17 6003.09,3313.21 6003.09,3318.91 v1(5974,3348) 5558.96,3348
  Top Layer w10: R34.2@3722.79,3807.15 3842.85,3807.15 3872,3778 ; R32.2@3724.8,3509.91 3749.91,3509.91 3784,3544 3784,3690 3872,3778 ; FPC4.2@3963.39,3931.61 3960,3928.21 3960,3802 ; L9.1@4414.78,3457.4 4348.18,3524 4290,3524 4254,3560 4254,3782 4298,3826 4348,3826 4359.4,3837.4 L8.1@4359.4,3934 ; C50.1@4523.64,3971.39 4548,3995.75 4548,4038 4525.23,4060.77 C53.2@4469.64,4060.77 4438.41,4060.77 4435.56,4063.61 4395.36,4063.61 4373.74,4042 C52.2@4372.54,4042 4368.96,4038.42 R20.2@4368.96,4002 4359.4,3992.44 L8.1@4359.4,3934 ; R4.2@5127.91,3225.27 5136,3217.17 v1(5136,3192) ; 5714.83,3816.83 5792,3894 5792,4043.19 5852,4103.19 6037.85,4103.19 R39.2@6054,4087.04 6064.96,4098 6558.27,4098 C76.2@6637.94,4018.33 6685.23,4018.33 C75.2@6686.13,4017.43 6691.58,4011.98 C56.2@6691.58,3956.81 6645.48,3956.81 C57.2@6635.36,3946.7 6580.7,3946.7 6486,3852 v1(6486,3724) 6574,3636 6574,3580 v1(6594,3560) ; 3872,3778 3936,3778 3960,3802 ; 3960,3802 4110,3952 4341.4,3952 L8.1@4359.4,3934
  内层1 w6.2: v1(4948,3630) 4948,3812 4994,3858 5158,3858 v1(5160,3856) 5182,3878 5198,3878 5222,3902 5262,3902 v1(5282,3882) ; v1(5170,3280) 5170,3300 5216,3346 5216,3446 5258,3488 5258,3788 5282,3812 v1(5282,3882) ; v1(5460,3770) 5394,3770 v1(5282,3882)
  CONNECTION w10: v1(5170,3280) 5880,3280 5994,3166 6090,3166 6140,3216 6140,3320 ; v1(5589,3405) 5710,3526 5710,3570 5732,3592 6160,3592 6292,3724 v1(6486,3724) ; v1(5974,3348) 5986,3360 6100,3360 6140,3320 ; v1(6594,3560) 6484,3560 6244,3320 6140,3320
  IO_PINS w10: v1(4546,4038) 5786,4038 v1(5794,4046)
  Bottom Layer w6.18: C33.2@5130.54,3760 5174,3803.46 5174,3842 v1(5160,3856)
  Bottom Layer w6.2: v1(4948,3630) 4996.83,3581.17 CARD1.4@4996.83,3536.57 ; C10.1@5201.35,3470.06 C13.1@5201.35,3516.71 5226,3541.36 5226,3850 5238,3862 5256,3862 5276,3882 v1(5282,3882) ; v1(5460,3770) 5690,3770 v1(5696,3776) ; v1(5974,3348) 5975.53,3349.53 FPC2.5@6022.69,3349.53 6024.22,3348 6084,3348 6114.05,3317.95 R41.1@6114.05,3298.84 R40.1@6114.05,3257.9
  Bottom Layer w10: FPC3.20@4459.79,3814.88 FPC3.19@4459.79,3795.2 4521.2,3795.2 4568,3842 4568,4016 v1(4546,4038) ; v1(5136,3192) 5136,3246 v1(5170,3280) ; v1(6594,3560) 6608.24,3574.24 U8.11@6640.46,3574.24
VCC_5V: C47.2 C48.2 C49.2 C51.2 C64.2 D1.2 F1.2 L10.1 R19.2 R22.2 R27.2 U1.7 U1.9 U1.10 U1.19 U5.4 U6.1 U7.5 U11.6 | length 5422.5
  Top Layer w6.18: D1.2@6648.15,3628.07 U7.5@6698.71,3628.07
  Top Layer w6.2: v1@6272.84,3398 6287.53,3412.69 6287.53,3426.81 6292.85,3432.13 6306.97,3432.13 U1.7@6309.7,3434.86
  Top Layer w10: v1(4220,3772) 4288.02,3840.02 4299.43,3840.02 U5.4@4318.81,3859.4 4318.81,3907.62 C51.2@4302,3924.44 ; v1(4356,3736) 4392.96,3736 R22.2@4396.96,3732 ; v1@6272.84,3398 6304.34,3398 ; U1.10@6309.71,3387.61 6304.34,3392.99 6304.34,3398 ; U1.9@6309.7,3403.36 6304.34,3398 ; U6.1@6422.93,3851.37 6435.37,3851.37 v1(6504,3920) ; U1.19@6431.75,3434.86 6466.09,3434.86 ; R19.2@6477.89,3423.06 6489.85,3435.02 6489.85,3438.24 6496.28,3444.68 6499.5,3444.68 6504.82,3450 6570,3450 v1(6584,3436) 6624,3436 F1.2@6671.5,3483.5 6671.5,3515.5 v1(6700,3544) ; v1(6584,3898) 6614.13,3867.87 6622.28,3867.87 6631.94,3858.2 6631.94,3850.06 6669.5,3812.5 R27.2@6675.24,3812.5 6663.28,3800.54 6660.06,3800.54 6653.63,3794.11 6653.63,3790.89 6652,3789.26 6652,3762 6680,3734 6706,3734 6713.07,3726.93 v1(6824,3726.93) ; U7.5@6698.71,3628.07 6700.78,3626 v1(6740,3626)
  CONNECTION w10: v1(5760,3572) 6096,3572 v1(6270,3398)
  IO_PINS w10: v1(4220,3772) 4256,3736 v1(4356,3736) 4384,3764 4860,3764 4980,3884 5166,3884 5206,3844 v1(5246,3844) ; v1(5588,3488) 5676,3488 v1(5760,3572)
  Bottom Layer w10: v1(5246,3844) 5246,3750 5350,3646 5350,3558 5448,3460 5560,3460 v1(5588,3488) ; v1(5760,3572) 5760,3598 5853.56,3691.56 C64.2@5944,3691.56 ; U11.6@6007.49,3563.51 6007.49,3566.77 5972.7,3601.56 5972.7,3662.86 C64.2@5944,3691.56 ; L10.1@6058,3721.15 6040.85,3704 5988.2,3704 5985.81,3701.61 5969.37,3701.61 5966.98,3704 5956.44,3704 C64.2@5944,3691.56 ; v1(6270,3398) 6292,3420 6439,3420 C47.2@6536.91,3322.09 ; v1(6504,3920) 6562,3920 v1(6584,3898) ; C49.2@6536.44,3210 6536.91,3210.47 C47.2@6536.91,3322.09 ; v1(6584,3436) 6536.91,3388.91 C47.2@6536.91,3322.09 ; v1(6700,3544) 6700,3586 v1(6740,3626) 6762,3648 6904,3648 6914,3658 6914,3702 6889.07,3726.93 v1(6824,3726.93)
VCC_DDR: C11.2 C12.2 C44.2 C45.1 L7.1 R17.2 U15.49 U15.50 U15.56 | length 2636.7
  Top Layer w6.2: v1(4948,3280) 4948,3343.31 4941.48,3349.83 4941.48,3357.36 4986.64,3402.52 5000.39,3402.52 U15.50@5042.49,3444.62 U15.49@5032.75,3454.37 ; v1(5068,3376) 5079.76,3376 5080.92,3374.84 5089.63,3374.84 U15.56@5100.96,3386.16
  Top Layer w10: C11.2@5056.92,3324.93 5057.43,3324.93 C12.2@5084.93,3297.43 ; 5068,3336.01 v1(5068,3376) ; v1(6364,3682) 6364.62,3682.62 C45.1@6406.93,3682.62 6436.41,3682.62 6482.35,3636.68 6485.57,3636.68 6492.01,3630.24 6492.01,3627.02 R17.2@6503.97,3615.06 6500.39,3611.48 C44.2@6500.39,3575.06 6524.6,3550.85 L7.1@6524.6,3506
  Bottom Layer w6.2: v1(4948,3280) 4948,3364 4962,3378 5066,3378 v1(5068,3376)
  Bottom Layer w10: v1(5068,3376) 5128,3376 5220,3284 5318,3284 5398,3204 5462,3204 5508,3250 5863.16,3250 cw(c5872.1,3243.62) 5872.1,3254.6 5970.52,3254.6 cw(c5970.52,3243.62) 5979.46,3250 6000,3250 6057.84,3192.16 6134.16,3192.16 6174,3232 6174,3354 6242,3422 6272,3422 6364,3514 6364,3533.2 6362.94,3534.26 6362.94,3614.23 6364,3615.29 v1(6364,3682)
VCC_FLASH: C31.2 C62.2 C63.2 L9.2 R37.2 R38.2 U10.8 U15.43 | length 2313.6
  Top Layer w5: 4940.26,3478.81 U15.43@4974.28,3512.83
  Top Layer w6.2: C62.2@4266.07,3456.85 4371.31,3456.85 L9.2@4371.86,3457.4 ; R37.2@4793.36,3330.2 4799.12,3324.44 v1(4799.12,3286.49)
  Top Layer w10: C62.2@4266.07,3456.85 4220,3410.78 4220,3330 4270,3280 R38.2@4291.14,3280 4303.1,3268.04 4303.1,3264.82 4338.11,3229.8 U10.8@4387.61,3229.8 4388,3229.41 v1(4388,3192) ; C31.2@4909.17,3449.17 4938.81,3478.81 4940.26,3478.81 v1(4957.19,3478.81)
  CONNECTION w10: v1(4799.12,3286.49) 4914.63,3402 5096,3402 5138,3360 5272,3360 5370,3458 5370,3486 5276,3580 5042,3580 4957.19,3495.19 v1(4957.19,3478.81)
  Bottom Layer w10: v1(4388,3192) 4704.63,3192 v1(4799.12,3286.49)
VDD_0V9: C9.2 C21.2 C22.2 C23.2 C24.2 C36.2 C40.2 C41.1 L5.1 R13.2 U15.10 U15.51 U15.54 U15.55 U15.67 U15.71 U15.82 U15.103 U15.115 U15.116 | length 3866.6
  Top Layer w6.2: U15.51@5052.24,3434.88 5053.42,3434.88 5064.75,3446.2 5072.27,3446.2 5074.48,3444 5096,3444 5100.38,3439.62 5100.38,3424.56 U15.54@5081.47,3405.65 U15.55@5091.21,3395.9 5119.31,3424 5195.23,3424 ccw(c5196.51,3433) 5197.78,3424 5203.29,3424 ; U15.10@5091.21,3859.84 5092.4,3859.84 5103.72,3848.51 5111.25,3848.51 5122.57,3859.84 5137.84,3859.84 5156,3878 5172,3878 5260,3790 5306,3790 5336.86,3820.86 U15.115@5340.78,3820.86 5340.78,3830.78 ; 5258,3298 5258,3303.31 U15.67@5233.6,3327.7 5214,3347.31 5214,3425.24 ; U15.71@5272.57,3366.67 5214,3425.24 ; U15.116@5331.03,3830.61 5331.21,3830.78 5340.78,3830.78 ; 5356.01,3846.01 5340.78,3830.78 ; U15.103@5457.71,3703.93 5501.85,3748.08 5501.85,3773.73 5546,3817.88 5546,3928 5535,3939 ; 5472.5,3404 5449.61,3404 U15.82@5379.75,3473.86 5332.78,3520.83 5300.83,3520.83 5213.24,3433.24 5213.24,3426 5212.25,3425 5203.29,3424 ; 5203.29,3424 5212.76,3424 5214,3425.24
  Top Layer w10: C36.2@5222,3219.46 v1(5258,3255.46) 5258,3298 ; 5356.01,3846.01 C9.2@5434.83,3924.83 ; v1(5406,3944) 5415.65,3944 C9.2@5434.83,3924.83 ; 5472.5,3404 v1(5548,3404) 5554,3404 5576,3382 5638.93,3382 v1(5658.93,3402) ; 5534.22,3941.19 5517.78,3941.19 5516.6,3940 5514,3940 5498.83,3924.83 C9.2@5434.83,3924.83 ; v1(6029.89,3192.05) 6096.05,3192.05 6143.06,3239.06 C40.2@6233.47,3239.06 6233.47,3267 L5.1@6258.93,3292.46 6285.54,3292.46 6315.61,3262.39 R13.2@6315.61,3240.14 6337.47,3262 6363.55,3262 C41.1@6364.93,3260.62
  CONNECTION w10: v1(5406,3944) 5386,3944 5266,3824 5266,3740 5328,3678 5328,3558 5376,3510 5442,3510 v1(5548,3404) ; v1(5658.93,3402) 5658.93,3355.07 5666,3348 5873.94,3348 v1(6029.89,3192.05)
  Bottom Layer w10: C23.2@5185.25,3219.19 5303.73,3219.19 C24.2@5304,3219.46 ; v1(5258,3255.46) 5258,3226.73 C21.2@5265.25,3219.48
WIFI_DN: U6.8 U8.12 | length 372.5
  Top Layer w6.18: v1(6554,3724) 6544,3734 6544,3798 6558,3812 U6.8@6589.07,3812
  Bottom Layer w6.18: U8.12@6530.23,3574.24 6530.23,3635.54 6534.6,3639.91 6538.49,3639.91 6542.86,3644.28 6542.86,3647.9 6538.49,3652.27 6514.82,3652.27 6510.45,3656.64 6510.45,3660.26 6514.82,3664.63 6545.63,3664.63 6550,3669 6550,3672.62 6545.63,3676.99 6534.6,3676.99 6530.23,3681.36 6530.23,3700.23 v1(6554,3724)
WIFI_DP: U6.9 U8.13 | length 372.5
  Top Layer w6.18: v1(6528,3828) 6585.39,3828 U6.9@6589.07,3831.68
  Bottom Layer w6.18: U8.13@6392.43,3574.24 6506,3687.81 6506,3806 v1(6528,3828)
WORK_LED: LED1.1 U15.58 | length 458.1
  Top Layer w6.2: U15.58@5120.44,3366.67 5128.37,3374.6 5128.37,3375.78 5131.77,3379.18 5131.77,3386.71 5132.49,3387.43 5132.49,3401.32 v1(5132.8,3401.63) ; v1(5420,3230) 5449.76,3200.24 LED1.1@5451.46,3200.24
  Bottom Layer w6.2: v1(5132.8,3401.63) 5141.68,3410.52 5141.68,3412 5149.57,3419.89 5164.43,3419.89 5172.32,3412 5238,3412 v1(5420,3230)
pads on no net: FPC1.1 FPC1.2 FPC1.3 FPC1.4 FPC1.6 SW5.2 SW5.3 U1.1 U1.4 U1.5 U1.12 U1.13 U1.15 U1.16 U1.17 U8.2 U8.3 U8.5 U8.6 U8.7 U8.8 U8.9 U8.10 U8.15 U8.16 U8.17 U8.18 U8.19 U8.20 U8.21 U8.22 U15.4 U15.6 U15.8 U15.9 U15.19 U15.35 U15.36 U15.60 U15.62 U15.63 U15.64 U15.65 U15.75 U15.76 U15.119 USB1.3 USB1.9

## Polygon pours and split planes (outlines as drawn)
GND on Top Layer (solid, remove dead copper, pour order 2): 3190,4194 7338,4194 7338,3064 3190,3064
GND on Bottom Layer (solid, remove dead copper, pour order 12): 3000,4250 7218,4250 7218,3014 3000,3014
GND on 内层1 (solid, remove dead copper): 3034.06,4170.62 7182.06,4170.62 7182.06,3040.62 3034.06,3040.62
GND on CONNECTION (solid, remove dead copper): 3130.83,4207.49 7278.83,4207.49 7278.83,3077.49 3130.83,3077.49
GND on IO_PINS (solid, remove dead copper): 3105.82,4178.62 7253.82,4178.62 7253.82,3048.62 3105.82,3048.62
GND on Top Layer (solid, remove dead copper, pour order 0): 6481,3172.25 6614,3172.25 6614,3150 6481,3150
GND on Bottom Layer (solid, remove dead copper, pour order 4): 6051.54,3490 6051.54,3541.54 6070,3560 6070,3490
GND on 内层2 (solid, remove dead copper): 3156,4240 7190,4240 7190,3000 3156,3000

## Keep-outs
Board Outline Layer:
  region: 3217.96,3695.68 3752.06,3695.68 3752.06,3559.8 3217.96,3559.8
  region: 3217.96,3695.68 3752.06,3695.68 3752.06,3559.8 3217.96,3559.8
  lines w0.1: 3217.96,3559.8 3752.06,3559.8 3752.06,3695.68 3217.96,3695.68 3217.96,3559.8
  lines w10: 3228,3136.14 6771.9,3136.14 6771.9,3373.23 7165.01,3373.23 7165.01,3883.86 6771.31,3883.86 6771.31,4120 3228,4120 3228,3136.14

## Other copper
Top Layer:
  region net GND: 5075.97,3272.93 5073.71,3265.93 ccw(c5076.34,3247.56) 5063.21,3260.68 5065.47,3278.18 ccw(c5078.6,3291.31)
CONNECTION:
  region net VCC_3V3: 5978.99,3360.06 5986.06,3352.99 5984.92,3351.65 5983.91,3350.11 5983.16,3348.62 5982.84,3347.45 5973.45,3356.84 5974.62,3357.16 5976.11,3357.91 5977.65,3358.92
Bottom Layer:
  region net VCC_5V: 6744.99,3638.06 6752.06,3630.99 6750.92,3629.65 6749.91,3628.11 6749.16,3626.62 6748.84,3625.45 6739.45,3634.84 6740.62,3635.16 6742.11,3635.91 6743.65,3636.92
  region net VCC_5V: 6515.86,3336.07 6520.96,3345.11 ccw(c6536.87,3366.33) 6536.87,3339.81 6521.16,3320.16 ccw(c6494.64,3320.16)

## Silkscreen, mask and mechanical layers (free items; w line width, h text height)
Top Silkscreen Layer:
  drawing of 14 lines, arcs and shapes, not listed
Bottom Silkscreen Layer:
  drawing of 4 lines, arcs and shapes, not listed
Top Solder Mask Layer:
  text "UART" at 3526,4046 h50
  text "RGB" at 5640,4036 h50
  text "Loader" at 6320,4024 h50
  text "RatumnScanner" at 3250,3880 h40
  text "V1.2" at 3250,3820 h40
  text "fix1" at 3476,3816 h40
  text "NC" at 3760.74,3783.4 h40
  text "Ratumn  / Scanner" at 3798,3584 h40
  text "NC" at 3758,3486 h40
  text "Flash" at 4574,3442 h50
  text "KEY" at 4080,3430 h50
  text "ciallo~" at 5548,3242 h40
  text "RST" at 6438,3218 h50
  text "ETH" at 4210,3160 h50
Bottom Solder Mask Layer:
  text "TFCard" at 5632,4038 h50
  text "github.com/Intyeco/RatumnScanner" at 4478,4036 h40
  text "WiFi" at 6138,4036 h50
  text "Apache 2.0" at 4228,3562 h35
  text "OpenSource / Project" at 4228,3468 h35
  text "RatumnScanner" at 4230,3392 h60
  text "CSI" at 4614,3360 h50
  text "V1.2 @20260329" at 4228,3342 h35
  text "fix1" at 3610,3340 h35
  text "I2C" at 6178,3158 h50
Mechanical Layer:
  lines w0.1: 3217.96,3559.8 3752.06,3559.8 3752.06,3695.68 3217.96,3695.68 3217.96,3559.8